# Allegro board M250V10_200210.brd
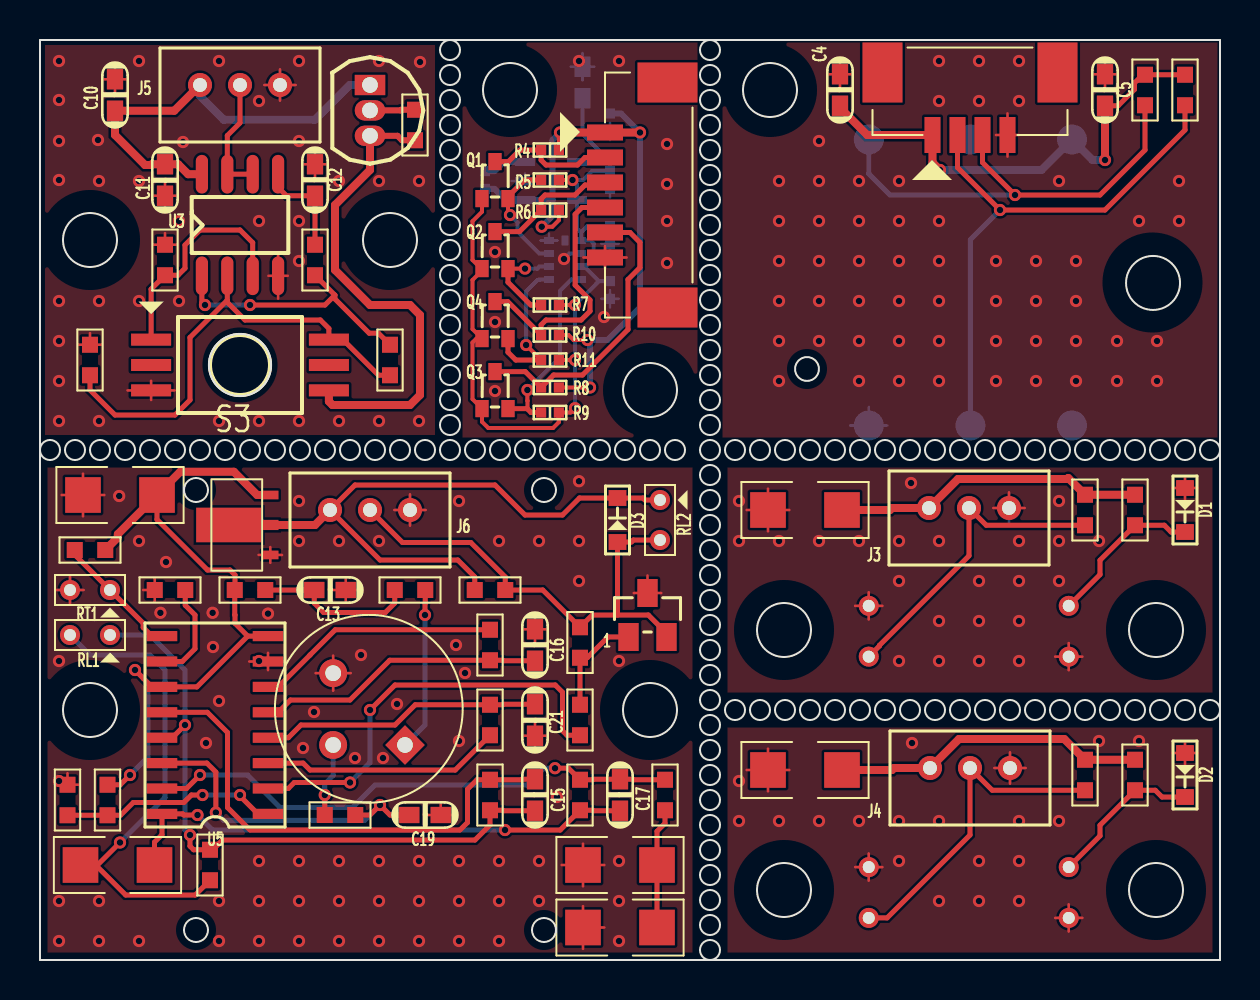
[diagram p0: board, top side]
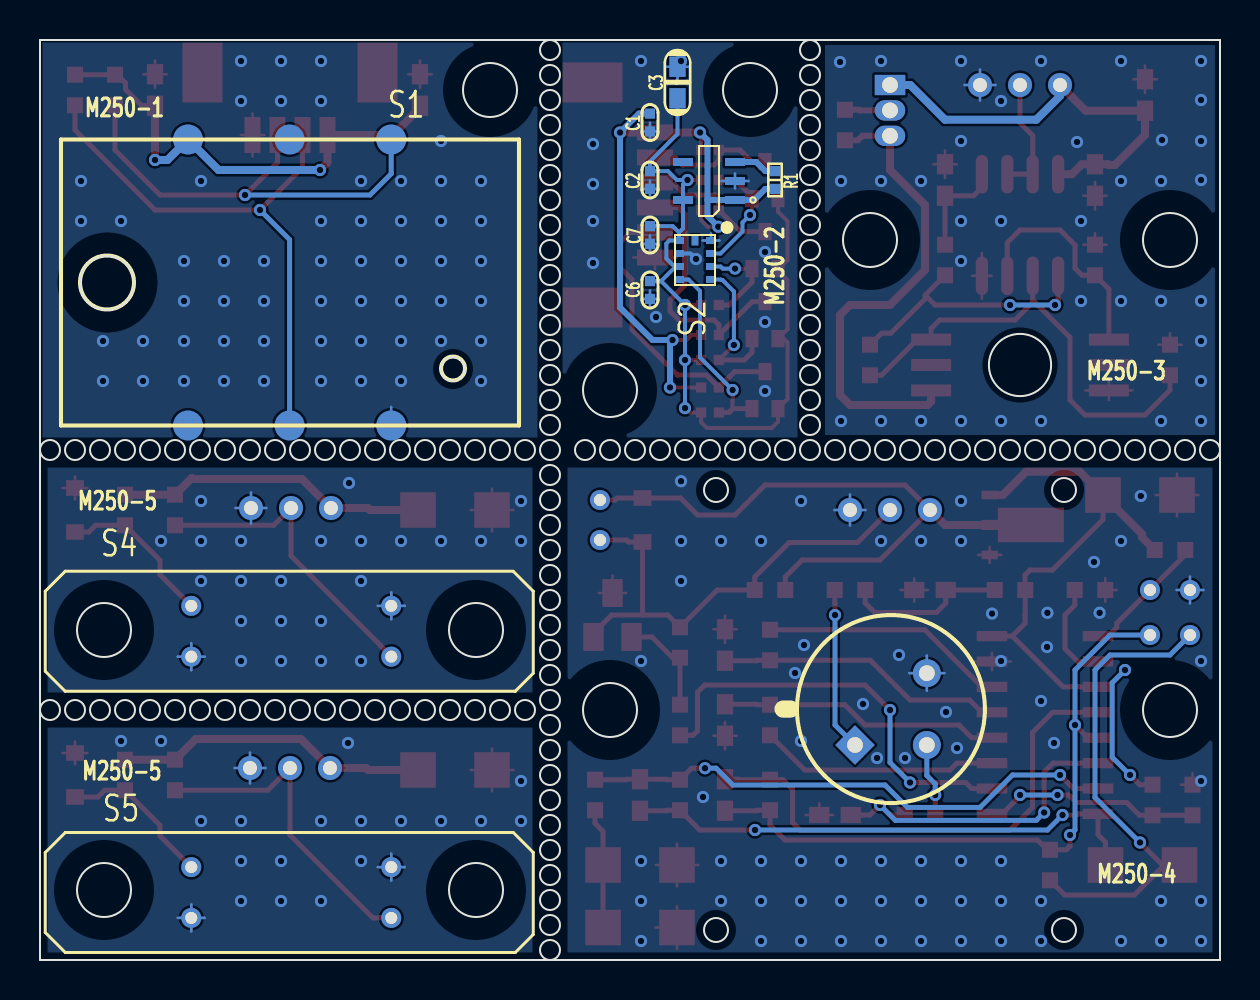
[diagram p1: board, bottom side, seen from below]

Outline 59 x 46 mm; copper layers: TOP, BOTTOM. Coordinates in mm from the lower left corner of the outline.
Outline path: circle c0.5,25.5 r0.5 ; circle c1.75,25.5 r0.5 ; circle c2.5,36 r1.35 ; circle c2.5,12.5 r1.35 ; circle c3,25.5 r0.5 ; circle c4.25,25.5 r0.5 ; circle c5.5,25.5 r0.5 ; circle c6.75,25.5 r0.5 ; circle c7.8,23.5 r0.6 ; circle c7.8,1.5 r0.6 ; circle c8,25.5 r0.5 ; circle c9.25,25.5 r0.5 ; circle c10,29.75 r1.56 ; circle c10.5,25.5 r0.5 ; circle c11.75,25.5 r0.5 ; circle c13,25.5 r0.5 ; circle c14.25,25.5 r0.5 ; circle c15.5,25.5 r0.5 ; circle c16.75,25.5 r0.5 ; circle c17.5,36 r1.35 ; circle c18,25.5 r0.5 ; circle c19.25,25.5 r0.5 ; circle c20.5,45.5 r0.5 ; circle c20.5,44.25 r0.5 ; circle c20.5,43 r0.5 ; circle c20.5,41.75 r0.5 ; circle c20.5,40.5 r0.5 ; circle c20.5,39.25 r0.5 ; circle c20.5,38 r0.5 ; circle c20.5,36.75 r0.5 ; circle c20.5,35.5 r0.5 ; circle c20.5,34.25 r0.5 ; circle c20.5,33 r0.5 ; circle c20.5,31.75 r0.5 ; circle c20.5,30.5 r0.5 ; circle c20.5,29.25 r0.5 ; circle c20.5,28 r0.5 ; circle c20.5,26.75 r0.5 ; circle c20.5,25.5 r0.5 ; circle c21.75,25.5 r0.5 ; circle c23,25.5 r0.5 ; circle c23.5,43.5 r1.35 ; circle c24.25,25.5 r0.5 ; circle c25.2,23.5 r0.6 ; circle c25.2,1.5 r0.6 ; circle c25.5,25.5 r0.5 ; circle c26.75,25.5 r0.5 ; circle c28,25.5 r0.5 ; circle c29.25,25.5 r0.5 ; circle c30.5,28.5 r1.35 ; circle c30.5,25.5 r0.5 ; circle c30.5,12.5 r1.35 ; circle c31.75,25.5 r0.5 ; circle c33.5,45.5 r0.5 ; circle c33.5,44.25 r0.5 ; circle c33.5,43 r0.5 ; circle c33.5,41.75 r0.5 ; circle c33.5,40.5 r0.5 ; circle c33.5,39.25 r0.5 ; circle c33.5,38 r0.5 ; circle c33.5,36.75 r0.5 ; circle c33.5,35.5 r0.5 ; circle c33.5,34.25 r0.5 ; circle c33.5,33 r0.5 ; circle c33.5,31.75 r0.5 ; circle c33.5,30.5 r0.5 ; circle c33.5,29.25 r0.5 ; circle c33.5,28 r0.5 ; circle c33.5,26.75 r0.5 ; circle c33.5,25.5 r0.5 ; circle c33.5,24.25 r0.5 ; circle c33.5,23 r0.5 ; circle c33.5,21.75 r0.5 ; circle c33.5,20.5 r0.5 ; circle c33.5,19.25 r0.5 ; circle c33.5,18 r0.5 ; circle c33.5,16.75 r0.5 ; circle c33.5,15.5 r0.5 ; circle c33.5,14.25 r0.5 ; circle c33.5,13 r0.5 ; circle c33.5,11.75 r0.5 ; circle c33.5,10.5 r0.5 ; circle c33.5,9.25 r0.5 ; circle c33.5,8 r0.5 ; circle c33.5,6.75 r0.5 ; circle c33.5,5.5 r0.5 ; circle c33.5,4.25 r0.5 ; circle c33.5,3 r0.5 ; circle c33.5,1.75 r0.5 ; circle c33.5,0.5 r0.5 ; circle c34.75,25.5 r0.5 ; circle c34.75,12.5 r0.5 ; circle c36,25.5 r0.5 ; circle c36,12.5 r0.5 ; circle c36.5,43.5 r1.35 ; circle c37.2,16.5 r1.35 ; circle c37.2,3.5 r1.35 ; circle c37.25,25.5 r0.5 ; circle c37.25,12.5 r0.5 ; circle c38.35,29.55 r0.6 ; circle c38.5,25.5 r0.5 ; circle c38.5,12.5 r0.5 ; circle c39.75,25.5 r0.5 ; circle c39.75,12.5 r0.5 ; circle c41,25.5 r0.5 ; circle c41,12.5 r0.5 ; circle c42.25,25.5 r0.5 ; circle c42.25,12.5 r0.5 ; circle c43.5,25.5 r0.5 ; circle c43.5,12.5 r0.5 ; circle c44.75,25.5 r0.5 ; circle c44.75,12.5 r0.5 ; circle c46,25.5 r0.5 ; circle c46,12.5 r0.5 ; circle c47.25,25.5 r0.5 ; circle c47.25,12.5 r0.5 ; circle c48.5,25.5 r0.5 ; circle c48.5,12.5 r0.5 ; circle c49.75,25.5 r0.5 ; circle c49.75,12.5 r0.5 ; circle c51,25.5 r0.5 ; circle c51,12.5 r0.5 ; circle c52.25,25.5 r0.5 ; circle c52.25,12.5 r0.5 ; circle c53.5,25.5 r0.5 ; circle c53.5,12.5 r0.5 ; circle c54.75,25.5 r0.5 ; circle c54.75,12.5 r0.5 ; circle c55.65,33.85 r1.35 ; circle c55.8,16.5 r1.35 ; circle c55.8,3.5 r1.35 ; circle c56,25.5 r0.5 ; circle c56,12.5 r0.5 ; circle c57.25,25.5 r0.5 ; circle c57.25,12.5 r0.5 ; circle c58.5,25.5 r0.5 ; circle c58.5,12.5 r0.5 ; 0,46 59,46 59,0 0,0 0,46

## Design rules (mm)
constraint set DEFAULT: min track width 0.127

## Placement (name value [footprint] x y rotation side)
C1  1uF  [C0402]  28.5 41.88 90 bottom
C2  104  [C0402]  28.5 39 90 bottom
C3  2.2uF  [C0603]  27.12 43.88 270 bottom
C4  104  [C0603]  40 43.5 270 top
C5  2.2uF  [C0603]  53.25 43.5 270 top
C6  102  [C0402]  28.5 33.5 90 bottom
C7  102  [C0402]  28.5 36.25 90 bottom
C8  106  [C1206]  38.25 22.5 0 top
C9  106  [C1206]  38.25 9.5 0 top
C10  105  [C0603]  3.75 43.25 270 top
C11  103  [C0603]  6.25 39 90 top
C12  332  [C0603]  13.75 39 270 top
C13  102  [C0603]  14.5 18.5 180 top
C14  106  [C1206]  4 23.25 0 top
C15  103  [C0603]  24.75 8.25 270 top
C16  104  [C0603]  24.75 15.75 270 top
C17  103  [C0603]  29 8.25 270 top
C18  106  [C1206]  3.88 4.75 180 top
C19  103  [C0603]  19.25 7.25 180 top
C20  106  [C1206]  29 4.75 180 top
C21  103  [C0603]  24.75 12 90 top
C22  106  [C1206]  29 1.62 180 top
D1  1N4148WS  [SOD-323]  57.25 22.5 90 top
D2  1N4148WS  [SOD-323]  57.25 9.25 90 top
D3  NI-1N4148WS  [SOD-323]  28.88 22 270 top
J1  WAFER 1.25 4P  [CCX-W125-04-SMT]  46.5 43.75 0 top
J2  WAFER 1.25 6P  [CCX-W125-06-SMT]  30.75 38.25 270 top
J3  WAFER 2.0 3P  [CP-W20-03]  46.45 22.6 180 top
J4  WAFER 2.0 3P  [CP-W20-03]  46.5 9.6 180 top
J5  WAFER 2.0 3P  [CP-W20-03]  10 43.75 180 top
J6  WAFER 2.0 3P  [CP-W20-03]  16.5 22.5 180 top
Q1  2N7002W  [SOT-323]  22.75 39 0 top
Q2  2N7002W  [SOT-323]  22.75 35.5 0 top
Q3  2N7002W  [SOT-323]  22.75 28.5 0 top
Q4  2N7002W  [SOT-323]  22.75 32 0 top
Q5  NI-2N7002  [SOT-23]  30.38 17.25 0 top
R1  100K  [R0402]  22.25 39 90 bottom
R2  10K  [R0603]  57.25 43.5 90 top
R3  10K  [R0603]  55.25 43.5 90 top
R4  10K  [R0402]  25.5 40.5 0 top
R5  10K  [R0402]  25.5 39 0 top
R6  10K  [R0402]  25.5 37.5 0 top
R7  10K  [R0402]  25.5 32.75 0 top
R8  10K  [R0402]  25.5 28.62 0 top
R9  10K  [R0402]  25.5 27.38 0 top
R10  10K  [R0402]  25.5 31.25 0 top
R11  10K  [R0402]  25.5 30 0 top
R12  1K  [R0603]  54.75 22.5 90 top
R13  5.1K  [R0603]  52.25 22.5 90 top
R14  1K  [R0603]  54.75 9.25 90 top
R15  5.1K  [R0603]  52.25 9.25 90 top
R16  680  [R0603]  18.75 41.75 90 top
R17  1M  [R0603]  13.75 35 90 top
R18  1.5M  [R0603]  6.25 35 270 top
R19  1.5M  [R0603]  2.5 30 270 top
R20  1.5M  [R0603]  17.5 30 90 top
R21  10K  [R0603]  10.5 18.5 180 top
R22  1M  [R0603]  2.5 20.5 0 top
R23  18K  [R0603]  18.5 18.5 180 top
R24  NI-10K  [R0603]  22.5 18.5 180 top
R25  1M  [R0603]  6.5 18.5 0 top
R26  1M  [R0603]  22.5 15.75 270 top
R27  1M  [R0603]  22.5 8.25 90 top
R28  10K  [R0603]  8.5 4.75 90 top
R29  0  [R0603]  27 15.88 90 top
R30  18K  [R0603]  15 7.25 0 top
R31  10K  [R0603]  22.5 12 90 top
R32  1.5K  [R0603]  27 12 90 top
R33  1M  [R0603]  27 8.25 90 top
R34  18K  [R0603]  31.25 8.25 90 top
R35  1K  [R0603]  3.38 8 90 top
R36  NI-1K  [R0603]  1.38 8 90 top
RL1  B2S  [PIN-W20-02]  2.5 16.25 180 top
RL2  NI-B2S  [PIN-W20-02]  31 22 270 top
RT1  B2S  [PIN-W20-02]  2.5 18.5 180 top
S1  MICS-VZ-89T  [MICS-VZ]  46.5 33.88 180 bottom
S2  2SMPB-02E  [LGA-9]  26.25 35 270 bottom
S3  2SMPP-02  [2SMPP]  10 29.75 90 top
S4  -  [ST151]  46.44 16.44 180 bottom
S5  -  [ST151]  46.44 3.38 180 bottom
S6  -  [TO-39]  18.25 10.75 135 bottom
U1  RT9013-18PB  [SOT23-5]  24.25 38 90 bottom
U2  LM334  [TO-92]  16.5 43.75 270 top
U3  TLC2272  [SOIC-8]  10 36.75 0 top
U4  HT7133  [SOT-89]  9.88 21.75 180 top
U5  BISS0001  [SOIC-16]  8.75 11.75 180 top

## Library data of the parts
C1 C3 C5 C8 C9 C14 C15 C17 C18 C20 C22 = CAPACITOR_0: room: PMU
C2 C4 C6 C7 C10-C13 C16 C19 C21 = CAPACITOR
D1-D3 = DIODE_SCHTKY_0
J1 = CONN RCPT 4
J2 = CONN RCPT 6
J3-J6 = CONN RECT 3
Q1-Q5 = MOS-N_8
R1 = RESISTOR
R2-R36 = R
RL1 RL2 RT1 = B2S_0
S1 = XC9216_3
S2 = XC9216_6
S3 = XC9216_7
S4 S5 = TLP632_1
S6 = MC78PC18NTR_3_TO-39_IRA-S210ST0
U1 = MC78PC18NTR_2
U2 = MC78PC18NTR_0
U3 = TLC2272/SO
U4 = AMS1117-AOI_3
U5 = NE555_2

## Footprints (pads in the part's own frame, mm; a bottom-side part is the same pattern mirrored in y, then rotated)
2SMPP
  rect 0.6x2 smd: 1(1.27,4.445) 2(0,4.445) 3(-1.27,4.445) 4(-1.27,-4.445) 5(0,-4.445) 6(1.27,-4.445)
C0402
  rect 0.508x0.508 smd: 1(-0.445,0) 2(0.445,0)
C0603
  rect 1.016x0.813 smd: 1(-0.787,0) 2(0.787,0)
C1206
  rect 1.78x1.78 smd: 1(-1.85,0) 2(1.85,0)
CCX-W125-04-SMT
  rect 2x3 smd: (-4.375,0.625) (4.375,0.625)
  rect 0.8x1.8 smd: 1(-1.875,-2.5) 2(-0.625,-2.5) 3(0.625,-2.5) 4(1.875,-2.5)
CCX-W125-06-SMT
  rect 2x3 smd: (-5.625,0.625) (5.625,0.625)
  rect 0.8x1.8 smd: 1(-3.125,-2.5) 2(-1.875,-2.5) 3(-0.625,-2.5) 4(0.625,-2.5) 5(1.875,-2.5) 6(3.125,-2.5)
CP-W20-03
  round 1.2 hole 0.7: 1(2,0) 2(0,0) 3(-2,0)
LGA-9
  rect 0.35x0.5 smd: 1(-0.975,0.8) 2(-0.325,0.8) 3(0.325,0.8) 4(0.975,0.8) 5(0.975,-0.8) 6(0.325,-0.8) 7(-0.325,-0.8) 8(-0.975,-0.8)
  rect 0.5x0.35 smd: 9(-0.975,0)
MICS-VZ
  round 1.5 smd: 1(-5.1,-7.15) 2(-0.02,-7.15) 3(5.06,-7.15) 4(5.06,7.15) 5(-0.02,7.15) 6(-5.1,7.15)
PIN-W20-02
  round 1 hole 0.6: 1(-1,0) 2(1,0)
R0402
  rect 0.508x0.508 smd: 1(-0.445,0) 2(0.445,0)
R0603
  rect 0.8x0.8 smd: 1(-0.762,0) 2(0.762,0)
SOD-323
  rect 0.787x0.889 smd: 1(1.1,0) 2(-1.1,0)
SOIC-8
  oval 0.61x1.93 smd: 1(-1.905,-2.54) 2(-0.635,-2.54) 3(0.635,-2.54) 4(1.905,-2.54) 5(1.905,2.54) 6(0.635,2.54) 7(-0.635,2.54) 8(-1.905,2.54)
SOIC-16
  rect 1.524x0.508 smd: 1(-2.65,4.445) 2(-2.65,3.175) 3(-2.65,1.905) 4(-2.65,0.635) 5(-2.65,-0.635) 6(-2.65,-1.905) 7(-2.65,-3.175) 8(-2.65,-4.445) 9(2.65,-4.445) 10(2.65,-3.175) 11(2.65,-1.905) 12(2.65,-0.635) 13(2.65,0.635) 14(2.65,1.905) 15(2.65,3.175) 16(2.65,4.445)
SOT23-5
  rect 0.4x1 smd: 1(0,0) 2(0.95,0) 3(1.9,0) 4(1.9,2.6) 5(0,2.6)
SOT-23
  rect 1.016x1.397 smd: 1(-0.95,-1.1) 2(0.95,-1.1) 3(0,1.1)
SOT-89
  rect 0.813x0.432 smd: 1(-1.64,1.497) 3(-1.64,-1.5)
  custom 4.115x1.727 smd: 2(0.011,-0.001)
SOT-323
  rect 0.66x0.86 smd: 1(-0.65,-0.93) 2(0.65,-0.93) 3(0,0.92)
ST151
  round 1 hole 0.6: 1(-5,-1.27) 2(-5,1.27) 3(5,1.27) 4(5,-1.27)
TO-39
  rect 1.397x1.397 hole 0.787: 1(0,0)
  round 1.397 hole 0.787: 2(2.54,-2.54) 3(5.08,0)
TO-92
  rect 1.016x1.524 hole 0.787: 1(0,0)
  oval 1.016x1.524 hole 0.787: 2(1.27,0) 3(2.54,0)

## Nets
3V3: C4.2 C5.2 J1.1 R2.2 R3.2 S1.6(VIN)
5V0: C10.2 C11.2 J5.1 U2.1 U3.8
GND: C1.1 C2.1 C3.1 C4.1 C5.1 C6.1 C7.1 C8.1 C9.1 C10.1 C11.1 C12.1 C13.1 C14.1 C16.1 C19.1 C20.2 C21.1 C22.2 D1.1 D2.1 J1.4 J2.6 J3.3 J4.3 J5.3 J6.3 Q5.3 R18.1 R19.1 R25.1 R36.2 RT1.2 S1.3 S2.1 S2.7 S3.3 S4.1 S4.3(EMITTER) S5.1 S5.3(EMITTER) S6.3 U1.2 U3.4 U4.1 U5.7(VSS)
V1.8: C2.2 C3.2 C6.2 C7.2 Q1.1 Q2.1 Q3.1 Q4.1 R5.2 R7.2 R9.2 R11.2 S2.6 S2.8 U1.5(VOUT)
V3.3: C1.2 J2.1 R1.1 R4.2 R6.2 R8.2 R10.2 U1.1
V5.0: C8.2 C9.2 J3.1 J4.1 R12.2 R13.2 R14.2 R15.2
I2C0-SCK: J1.2 R2.1 S1.2
I2C0-SDA: J1.3 R3.1 S1.4
OSW: J3.2 J4.2 R13.1 R15.1 S4.4 S5.4
PIR: D3.1 J6.2 Q5.2(SOURCE) R24.1 R29.2 RL2.2
PRS: J5.2 U3.6 U3.7(OUT)
PRS_CLK: Q2.2(SOURCE) R7.1 S2.3
PRS_CSB: Q1.2(SOURCE) R5.1 S2.2
PRS_MISO: Q3.2(SOURCE) R9.1 S2.5
PRS_MOSI: Q4.2(SOURCE) R11.1 S2.4
SPI-CLK: J2.3 Q2.3 R6.1
SPI-CS: J2.2 Q1.3 R4.1
SPI-MISO: J2.5 Q3.3 R8.1
SPI-MOSI: J2.4 Q4.3 R10.1
VC3: C14.2 R21.2 R22.2 R35.2 U4.3(VOUT) U5.8 U5.11
VC5: D3.2(C) J6.1 R24.2 RL2.1 U4.2
N16739615: R1.2 U1.3
N16752520: R16.2 U2.2
N16752527: R16.1 S3.4 U2.3(V-)
N16752698: R19.2 R20.1 S3.6(VO-) U3.2
N16753772: R18.2 S3.1 U3.3
N16753820: R17.1 R20.2 U3.1
N16754889: C12.2 R17.2 U3.5
N16759389: D1.2(C) R12.1 S4.2
N16759996: R23.1 S6.1
N16766845: C15.2 R27.1 R28.2 RL1.1 U5.13
N16766853: C15.1 R27.2 U5.12
N16767234: C18.2 R28.1 RL1.2
N16767303: C17.2 C18.1 R33.1 U5.16
N16767311: C17.1 R33.2 R34.2 U5.15
N16767751: C20.1 C22.1 R34.1
N16768643: R30.1 S6.2(S)
N16768647: C19.2 R30.2 U5.14
N16769008: R22.1 RT1.1 U5.9
N16770080: C13.2 R21.1 R23.2
N16770609: R35.1 R36.1 U5.1
N16770930: R32.1 U5.2
N16771107: Q5.1 R29.1 R32.2
N16772170: R31.1 U5.3
N16772238: C21.2 R31.2 U5.4
N16772569: C16.2 R26.2 U5.5
N16772626: R26.1 U5.6
N16777000: R25.2 U5.10
N16790844: D2.2(C) R14.1 S5.2

Pads without a net: S1 1 5; S2 9; S3 2 5; U1 4

## Via types
v1: diameter 0.61, hole 0.33, TOP to BOTTOM, 245 vias

## Routing (per net, layer and track width the routed paths; a pad name or vN(x,y) marks a point on that pad's centre or on a via; arc(x,y) is an arc through that point)
3V3: length 24
  TOP w0.25: C5.2 53.91,42.71 54.73,43.53 54.73,43.85 55.14,44.26 R3.2 R2.2
  TOP w0.4: v1(45,39.5) 44.62,39.88 J1.1 41.36,41.25 40,42.61 C4.2 ; C5.2 v1(53.25,40)
  BOTTOM w0.4: v1(53.25,40) 52.62,40 S1.6 50.08,39.5 v1(45,39.5)
5V0: length 21.4
  TOP w0.4: J5.1 6.71,42.46 C10.2 3.75,41.25 5.25,39.75 5.55,39.75 5.59,39.79 C11.2 6.91,39.79 7.41,39.29 U3.8
  BOTTOM w0.4: U2.1 15.49,43.75 13.75,42.01 9.18,42.01 8,43.2 J5.1
GND: length 149.2
  TOP w0.127: C22.2 28.22,1.62 ; C22.2 27.15,0.56 ; C22.2 27.15,2.69 ; RT1.2 1.5,19.18 ; RT1.2 0.82,18.5 ; RT1.2 1.5,17.82 ; RT1.2 2.18,18.5 ; 11.4,14.49 U5.7 ; U5.7 12.34,14.93 ; U5.7 10.46,14.93 ; U5.7 11.4,15.36 ; J4.3 49.28,9.6 ; J4.3 48.5,8.82 ; J4.3 47.72,9.6 ; J4.3 48.5,10.38 ; 6.25,37.53 C11.1 ; C11.1 6.25,38.9 ; C11.1 5.67,38.21 ; C11.1 6.83,38.21 ; J2.6 29.33,35.12 ; J2.6 27.17,35.12 ; J2.6 28.25,35.7 ; J2.6 28.25,34.55 ; S4.3 41.44,18.39 ; S4.3 42.12,17.71 ; S4.3 40.76,17.71 ; S4.3 41.44,17.03 ; R19.1 3.08,30.76 ; R19.1 2.5,31.34 ; R19.1 1.92,30.76 ; C5.1 53.25,44.97 ; C5.1 53.25,43.6 ; C5.1 53.83,44.29 ; C5.1 52.67,44.29 ; C12.1 13.75,40.47 ; C12.1 14.33,39.79 ; C12.1 13.17,39.79 ; C12.1 13.75,39.1 ; C13.1 15.29,19.08 ; C13.1 15.29,17.92 ; C13.1 15.97,18.5 ; C13.1 14.6,18.5 ; 39.42,44.29 C4.1 ; C4.1 40,44.97 ; C4.1 40,43.6 ; C4.1 40.58,44.29 ; 10.93,20.25 U4.1 ; U4.1 12.1,20.25 ; U4.1 11.52,20.65 ; U4.1 11.52,19.86 ; S5.1 52.12,2.11 ; S5.1 50.76,2.11 ; S5.1 51.44,2.78 ; S5.1 51.44,1.43 ; 18.5,21.72 J6.3 ; J6.3 18.5,23.28 ; J6.3 17.72,22.5 ; J6.3 19.28,22.5 ; Q5.3 31.06,18.35 ; Q5.3 29.69,18.35 ; Q5.3 30.38,19.23 ; 3.17,44.04 C10.1 ; C10.1 3.75,44.72 ; C10.1 3.75,43.35 ; C10.1 4.33,44.04 ; 40.76,4.64 S5.3 ; S5.3 41.44,5.32 ; S5.3 42.12,4.64 ; S5.3 41.44,3.97 ; C9.1 36.4,10.57 ; C9.1 35.33,9.5 ; C9.1 37.47,9.5 ; C9.1 36.4,8.43 ; J1.4 48.95,41.25 ; J1.4 48.38,42.33 ; J1.4 47.8,41.25 ; J1.4 48.38,40.17 ; 35.33,22.5 C8.1 ; C8.1 36.4,21.43 ; C8.1 36.4,23.57 ; C8.1 37.47,22.5 ; R36.2 1.38,9.34 ; R36.2 0.8,8.76 ; R36.2 1.95,8.76 ; C20.2 28.22,4.75 ; C20.2 27.15,3.68 ; C20.2 26.08,4.75 ; C20.2 27.15,5.82 ; 5.67,35.76 R18.1 ; R18.1 6.83,35.76 ; R18.1 6.25,36.34 ; 24.17,11.21 C21.1 ; C21.1 24.75,10.53 ; C21.1 24.75,11.9 ; C21.1 25.33,11.21 ; R25.1 5.74,19.08 ; R25.1 5.16,18.5 ; R25.1 5.74,17.92 ; J5.3 12.78,43.75 ; J5.3 11.22,43.75 ; J5.3 12,44.53 ; J5.3 12,42.97 ; S4.1 51.44,15.85 ; S4.1 51.44,14.49 ; S4.1 52.12,15.17 ; S4.1 50.76,15.17 ; C16.1 24.75,17.22 ; C16.1 24.17,16.54 ; C16.1 25.33,16.54 ; C16.1 24.75,15.85 ; 57.25,9.78 D2.1 ; D2.1 57.25,10.92 ; D2.1 56.63,10.35 ; D2.1 57.87,10.35 ; J3.3 48.45,23.38 ; J3.3 49.23,22.6 ; J3.3 47.67,22.6 ; C19.1 20.72,7.25 ; C19.1 19.35,7.25 ; C19.1 20.04,7.83 ; U3.4 12.39,34.21 ; U3.4 11.91,35.35 ; U3.4 11.91,33.07 ; U3.4 11.42,34.21 ; D1.1 57.25,24.17 ; D1.1 57.25,23.03 ; D1.1 57.87,23.6 ; D1.1 56.63,23.6 ; 13.78,14.34 S6.3 ; S6.3 14.66,13.47 ; S6.3 15.53,14.34 ; S6.3 14.66,15.22 ; C14.1 2.15,24.32 ; C14.1 2.15,22.18 ; C14.1 3.22,23.25 ; C14.1 1.08,23.25 ; 5.55,28 S3.3 ; S3.3 6.73,28.48 ; S3.3 5.55,28.96 ; S3.3 4.38,28.48
  BOTTOM w0.127: 28.07,35.81 C7.1 ; C7.1 28.5,36.24 ; C7.1 28.93,35.81 ; C7.1 28.5,35.37 ; 51.44,1.43 S5.1 ; S5.1 51.44,2.78 ; S5.1 52.12,2.11 ; S5.1 50.76,2.11 ; RT1.2 2.18,18.5 ; RT1.2 1.5,17.82 ; RT1.2 1.5,19.18 ; RT1.2 0.82,18.5 ; 47.72,9.6 J4.3 ; J4.3 48.5,8.82 ; J4.3 48.5,10.38 ; J4.3 49.28,9.6 ; S5.3 42.12,4.64 ; S5.3 41.44,5.32 ; S5.3 40.76,4.64 ; S5.3 41.44,3.97 ; 24.25,38.57 U1.2 ; U1.2 24.25,39.33 ; U1.2 24.93,38.95 ; U1.2 23.57,38.95 ; C6.1 28.5,33.49 ; C6.1 28.93,33.06 ; C6.1 28.5,32.62 ; C6.1 28.07,33.06 ; 28.5,38.12 C2.1 ; C2.1 28.5,38.99 ; C2.1 28.93,38.56 ; C2.1 28.07,38.56 ; S4.3 41.44,18.39 ; S4.3 41.44,17.03 ; S4.3 42.12,17.71 ; S4.3 40.76,17.71 ; 27.12,43.98 C3.1 ; C3.1 26.54,44.66 ; C3.1 27.71,44.66 ; C3.1 27.12,45.35 ; S4.1 51.44,15.85 ; S4.1 50.76,15.17 ; S4.1 52.12,15.17 ; S4.1 51.44,14.49 ; S1.3 42.37,26.73 ; S1.3 40.51,26.73 ; S1.3 41.44,27.65 ; 28.07,41.43 C1.1 ; C1.1 28.93,41.43 ; C1.1 28.5,41 ; C1.1 28.5,41.86 ; J3.3 48.45,23.38 ; J3.3 49.23,22.6 ; J3.3 47.67,22.6 ; J3.3 48.45,21.82 ; 13.78,14.34 S6.3 ; S6.3 14.66,15.22 ; S6.3 14.66,13.47 ; S6.3 15.53,14.34 ; 12,42.97 J5.3 ; J5.3 12,44.53 ; J5.3 12.78,43.75 ; J5.3 11.22,43.75 ; J6.3 19.28,22.5 ; J6.3 18.5,21.72 ; J6.3 17.72,22.5 ; J6.3 18.5,23.28 ; 25.02,35.98 S2.1 ; S2.1 25.88,35.98 ; S2.1 25.45,36.33
  BOTTOM w0.2: v1(26.2,35.05) 26.48,35.33 S2.7
  vias: v1(0.95,44.95) v1(0.95,43) v1(0.95,40.95) v1(0.95,39) v1(0.95,32.95) v1(0.95,30.95) v1(0.95,28.95) v1(0.95,26.95) v1(0.95,14.95) v1(0.95,8.95) v1(0.95,2.95) v1(0.95,0.95) v1(2.9,41) v1(2.95,38.95) v1(2.95,32.95) v1(2.95,26.95) v1(2.95,2.95) v1(2.95,0.95) v1(3.96,23.2) v1(4.95,44.95) v1(4.95,38.95) v1(4.95,32.95) v1(4.95,20.95) v1(4.95,0.95) v1(6.02,17.36) v1(6.3,19.9) v1(6.95,36.95) v1(6.95,32.95) v1(7.15,40.9) v1(8.3,10.85) v1(8.63,17.36) v1(8.65,15.65) v1(8.95,44.95) v1(8.95,26.95) v1(8.95,12.95) v1(8.95,2.95) v1(8.95,0.95) v1(10.95,42.95) v1(10.95,36.95) v1(10.95,26.95) v1(10.95,14.95) v1(10.95,4.95) v1(10.95,2.95) v1(10.95,0.95) v1(11.4,17.32) v1(12.95,44.95) v1(12.95,40.95) v1(12.95,36.95) v1(12.95,34.95) v1(12.95,26.95) v1(12.95,22.95) v1(12.95,20.95) v1(12.95,4.95) v1(12.95,2.95) v1(12.95,0.95) v1(13.15,10.6) v1(13.7,12.4) v1(14.95,38.95) v1(14.95,26.95) v1(14.95,20.95) v1(14.95,4.95) v1(14.95,2.95) v1(14.95,0.95) v1(15.75,10.1) v1(16.05,15.25) v1(16.95,44.95) v1(16.95,38.95) v1(16.95,26.95) v1(16.95,20.95) v1(16.95,4.95) v1(16.95,2.95) v1(16.95,0.95) v1(17.15,10.1) v1(17.85,12.8) v1(19,44.9) v1(18.95,38.95) v1(18.95,26.95) v1(18.95,4.95) v1(18.95,2.95) v1(18.95,0.95) v1(20.8,15.75) v1(20.95,22.95) v1(20.95,10.95) v1(20.95,4.95) v1(20.95,2.95) v1(20.95,0.95) v1(21.25,14.35) v1(22.75,35.4) v1(22.75,31.9) v1(22.75,28.45) v1(22.95,20.95) v1(22.95,4.95) v1(22.95,2.95) v1(22.95,0.95) v1(24.95,20.95) v1(24.95,4.95) v1(24.95,2.95) v1(25.85,8.15) v1(26.95,44.95) v1(26.95,23.94) v1(26.95,20.95) v1(26.95,18.95) v1(28.2,32.15) v1(28.95,44.95) v1(28.95,14.95) v1(28.95,4.95) v1(28.95,2.95) v1(28.95,0.95) v1(31.35,40.8) v1(31.35,38.8) v1(31.35,36.95) v1(31.35,34.85) v1(34.95,22.95) v1(34.95,20.95) v1(34.95,8.95) v1(34.95,6.95) v1(36.95,38.95) v1(36.95,36.95) v1(36.95,34.95) v1(36.95,32.95) v1(36.95,30.95) v1(36.95,28.95) v1(36.95,20.95) v1(36.95,6.95) v1(38.95,40.95) v1(38.95,38.95) v1(38.95,36.95) v1(38.95,34.95) v1(38.95,32.95) v1(38.95,30.95) v1(38.95,20.95) v1(38.95,6.95) v1(40.95,38.95) v1(40.95,36.95) v1(40.95,34.95) v1(40.95,32.95) v1(40.95,30.95) v1(40.95,28.95) v1(40.95,20.95) v1(40.95,6.95) v1(42.95,38.95) v1(42.95,36.95) v1(42.95,34.95) v1(42.95,32.95) v1(42.95,30.95) v1(42.95,28.95) v1(42.95,20.95) v1(42.95,18.95) v1(42.95,14.95) v1(42.95,6.95) v1(42.95,4.95) v1(43.55,23.85) v1(43.6,10.85) v1(44.95,44.95) v1(44.95,42.95) v1(44.95,36.95) v1(44.95,34.95) v1(44.95,32.95) v1(44.95,30.95) v1(44.95,28.95) v1(44.95,20.95) v1(44.95,16.95) v1(44.95,14.95) v1(44.95,6.95) v1(44.95,2.95) v1(46.95,44.95) v1(46.95,42.95) v1(46.95,18.95) v1(46.95,16.95) v1(46.95,14.95) v1(46.95,4.95) v1(46.95,2.95) v1(47.8,34.95) v1(47.8,32.95) v1(47.8,30.95) v1(47.8,28.95) v1(48.95,44.95) v1(48.95,42.95) v1(48.95,20.95) v1(48.95,18.95) v1(48.95,16.95) v1(48.95,14.95) v1(48.95,6.95) v1(48.95,4.95) v1(48.95,2.95) v1(49.8,34.95) v1(49.8,32.95) v1(49.8,30.95) v1(49.8,28.95) v1(50.95,38.95) v1(50.95,22.95) v1(50.95,20.95) v1(50.95,18.95) v1(50.95,6.95) v1(51.8,34.95) v1(51.8,32.95) v1(51.8,30.95) v1(51.8,28.95) v1(52.95,20.95) v1(52.95,10.95) v1(53.85,30.95) v1(53.85,28.95) v1(54.95,36.95) v1(54.95,10.95) v1(55.85,30.95) v1(55.85,28.95) v1(56.95,38.95) v1(56.95,36.95)
V1.8: length 42
  TOP w0.2: R7.2 v1(26.75,32.75) ; v1(26.62,39) R5.2 ; Q1.1 22.1,37.41 21.62,36.94 21.62,35 22.05,34.57 Q2.1 22.1,34.48 21.62,34 21.62,31.55 Q4.1 21.82,31.07 21.62,30.88 21.62,28.05 Q3.1 22.1,26.91 22.41,26.6 25.65,26.6 25.94,26.89 R9.2 26.53,27.38 v1(26.75,27.59) ; R11.2 v1(26.75,30)
  BOTTOM w0.2: 27.94,33.94 27.28,34.61 27.28,34.67 ; 27.94,33.94 C6.2 ; 27.94,33.94 v1(26.75,32.75) v1(26.75,30) v1(26.75,27.59) ; C3.2 27.12,41.3 28.5,39.93 C2.2 27.6,39.44 27.16,39 v1(26.62,39) 26.85,38.77 U1.5 26.85,36.58 27.05,36.38 ; C7.2 27.37,36.69 27.05,36.38 ; 27.05,36.38 S2.8 27.53,35.98 27.68,35.82 27.68,35.08 27.28,34.67 ; 27.28,34.67 S2.6
V3.3: length 34.6
  TOP w0.2: v1(25.09,36.66) 25.62,36.66 25.94,36.99 R6.2 ; v1(26,41.38) 25.94,41.32 R4.2 ; R10.2 26.43,31.25 26.68,31 v1(27.38,31) ; R8.2 v1(27.5,28.62)
  TOP w0.4: v1(30,41.38) J2.1 v1(26,41.38)
  BOTTOM w0.3: 25.62,38.01 25.62,37.2 v1(25.09,36.66) ; 25.62,38.01 25.62,40.75 25.62,40.75 25.62,41 v1(26,41.38) ; 25.62,38.01 25.62,38 U1.1 23.29,38 22.73,38.56 R1.1 ; v1(27.5,28.62) 27.5,30.88 v1(27.38,31) 28.38,31 30,32.62 v1(30,41.38) 29.06,42.32 C1.2
V5.0: length 31.4
  TOP w0.4: R12.2 R13.2 51.41,24.1 51.36,24.05 45.9,24.05 J3.1 42.6,22.6 42.5,22.5 C8.2 ; C9.2 42.6,9.5 42.7,9.6 J4.1 45.95,11.05 51.21,11.05 R15.2 R14.2
I2C0-SCK: length 28.2
  TOP w0.25: J1.2 45.88,39.62 v1(48,37.5) 53.25,37.5 57.25,41.5 R2.1
  BOTTOM w0.25: S1.2 46.52,36.02 v1(48,37.5)
I2C0-SDA: length 22.8
  TOP w0.25: R3.1 55.25,40.5 53,38.25 v1(48.75,38.25) 47.12,39.88 J1.3
  BOTTOM w0.25: v1(48.75,38.25) 42.5,38.25 41.44,39.31 S1.4
OSW: length 32
  TOP w0.25: S5.4 42.36,2.11 46.5,6.25 J4.2 47.61,8.49 R15.1 ; R13.1 47.31,21.74 J3.2 46.45,20.21 41.97,15.73 41.97,15.7 S4.4
PIR: length 24.3
  TOP w0.25: J6.2 18.12,20.88 21.54,20.88 23.26,19.15 R24.1 25.14,18.5 R29.2 27.61,17.25 28.88,17.25 ; Q5.2 31.32,16.34 30.42,17.25 28.88,17.25 ; 28.88,17.25 D3.1 29.57,20.9 29.67,21 RL2.2
PRS: length 6
  TOP w0.25: U3.6 U3.7 9.37,41.22 10,41.86 J5.2
PRS_CLK: length 4.9
  TOP w0.2: Q2.2 v1(24.25,34.57)
  TOP w0.25: Q2.2 23.4,33.89 24.54,32.75 R7.1
  BOTTOM w0.2: v1(24.25,34.57) 24.87,34.57 24.97,34.67 S2.3
PRS_CSB: length 6
  TOP w0.2: v1(23.5,37.25) 23.4,37.35 Q1.2
  TOP w0.25: R5.1 24.23,39 23.4,38.17 Q1.2
  BOTTOM w0.2: v1(23.5,37.25) 23.88,36.87 23.88,36.42 24.97,35.33 S2.2
PRS_MISO: length 9.9
  TOP w0.2: 24.57,27.38 24.38,27.57 24.38,27.96 24.37,27.97 v1(24.37,28.5)
  TOP w0.25: R9.1 24.55,27.38 24.35,27.57 Q3.2
  BOTTOM w0.2: v1(24.37,28.5) 26,30.13 26,33.45 26.57,34.02 S2.5
PRS_MOSI: length 7.6
  TOP w0.2: R11.1 v1(24.31,30.75)
  TOP w0.25: R11.1 23.79,30 23.4,30.39 Q4.2
  BOTTOM w0.2: S2.4 24.97,34.02 24.95,34 24.88,34 24.31,33.43 v1(24.31,30.75)
SPI-CLK: length 6.8
  TOP w0.25: J2.3 28.12,38.75 27.25,38.75 26.75,38.25 25.25,38.25 25.06,38.06 R6.1 23.98,36.42 Q2.3
SPI-CS: length 6.5
  TOP w0.25: J2.2 27.25,40.12 26.88,39.75 25.3,39.75 25.06,39.99 R4.1 24,40.5 23.42,39.92 Q1.3
SPI-MISO: length 14.7
  TOP w0.25: Q3.3 24.26,29.42 R8.1 25.68,29.25 27.12,29.25 29.4,31.52 29.4,34.02 30,34.62 30,35.88 29.5,36.38 J2.5
SPI-MOSI: length 13
  TOP w0.25: Q4.3 23.39,32.92 R10.1 25.06,31.76 25.3,32 27.06,32 27.5,32.44 27.5,33 26.76,33.74 26.76,37.28 27.1,37.62 J2.4
VC3: length 35.3
  TOP w0.25: 10.39,16.2 U5.8 ; 10.39,16.2 7.85,13.65 U5.11 5.59,13.65 5.16,14.09 5.16,14.09 v1(4.75,14.5) ; 10.39,16.2 9.75,16.83 9.75,17.25 9.74,17.26 R21.2 9.75,18.51 9.75,19.25 9.5,19.5 8.38,19.5 5.85,22.02 C14.2 ; v1(4.5,9.25) 4.01,8.76 R35.2
  TOP w0.4: R22.2 3.89,21.13 3.89,21.29 C14.2 7.01,24.41 9.69,24.41 10.86,23.25 U4.3
  BOTTOM w0.25: v1(4.75,14.5) 5.39,13.86 5.39,10.14 v1(4.5,9.25)
VC5: length 32.3
  TOP w0.25: R24.2 21.74,19.15 20.89,20 17,20 J6.1 15.75,23.75 22.75,23.75 24.25,22.25 26.12,22.25 26.98,23.1 D3.2 30.15,23.1 30.25,23 RL2.1
  TOP w0.4: J6.1 13.75,21.75 U4.2
N16739615: length 2.2
  BOTTOM w0.3: R1.2 22.73,39.44 23.19,39.9 U1.3
N16752520: length 2.3
  TOP w0.3: U2.2 18.02,42.48 18.06,42.51 R16.2
N16752527: length 24.3
  TOP w0.3: U2.3 17.88,41.21 18.1,40.99 R16.1
  TOP w0.4: 14.45,28.48 14.45,27.93 14.62,27.75 18.5,27.75 19,28.25 19,32.25 18.5,32.75 16.5,32.75 14.75,34.5 14.75,37.75 16.5,39.5 U2.3
N16752698: length 23.6
  TOP w0.25: R19.2 2.5,28.5 3.75,27.25 6.75,27.25 7.5,28 7.5,31.13 9.37,32.99 ; 9.37,32.99 U3.2 ; 9.37,32.99 9.37,32.89 10.25,32 14.02,32 14.45,31.57 14.45,31.02 15.14,31.02 16.93,29.24 R20.1
N16753772: length 11.4
  TOP w0.25: U3.3 10.63,35.86 10,36.5 8,36.5 7.25,35.75 7.25,34.59 6.9,34.24 R18.2 5.55,33.54 S3.1
N16753820: length 13.5
  TOP w0.25: 14.74,33.24 14.25,32.75 v1(10.5,32.75) ; 14.74,33.24 R17.1 ; 14.74,33.24 14.74,33.06 16.46,31.34 16.92,31.34 R20.2 ; U3.1 8.1,32.91 v1(8.25,32.75)
  BOTTOM w0.25: v1(8.25,32.75) v1(10.5,32.75)
N16754889: length 5.1
  TOP w0.25: U3.5 11.91,38.63 12.32,38.21 C12.2 R17.2
N16759389: length 8
  TOP w0.25: D1.2 56.55,21.4 56.22,21.74 R12.1 53,19.99 53,19.27 S4.2
N16759996: length 8.2
  TOP w0.25: R23.1 19.26,17.85 19.25,17.84 v1(19.25,17.25)
  BOTTOM w0.25: S6.1 19.25,11.75 v1(19.25,17.25)
N16766845: length 33.4
  TOP w0.25: C15.2 23.18,7.46 23.15,7.49 R27.1 22.5,6.75 21.75,6 9.12,6 8.64,5.51 R28.2 7.68,5.51 7.5,5.69 v1(7.5,6.25) ; U5.13 6.62,11.12 v1(7.25,11.75)
  BOTTOM w0.25: RL1.1 5.5,16.25 7.25,14.5 v1(7.25,11.75) 7.25,6.5 v1(7.5,6.25)
N16766853: length 25.3
  TOP w0.25: C15.1 24.09,9.04 24.07,9.01 R27.2 21.85,9.01 21.38,8.54 21.38,6.88 21,6.5 10.5,6.5 9.38,7.62 9.38,11.38 8.37,12.38 6.1,12.38
N16767234: length 24.1
  TOP w0.25: 2.88,4.75 v1(4,5.88) ; 2.88,4.75 2.88,4.66 4.28,3.25 7.76,3.25 R28.1 ; 2.88,4.75 C18.2
  BOTTOM w0.25: v1(4,5.88) 6.25,8.12 6.25,14.5 5.5,15.25 2.5,15.25 RL1.2
N16767303: length 26.4
  TOP w0.25: C18.1 5.72,5.89 6.1,6.27 U5.16 7.14,7.3 7.19,7.25 v1(7.88,7.25) ; v1(23.25,6.5) 26.01,6.5 R33.1 27.65,7.49 27.68,7.46 C17.2
  BOTTOM w0.25: v1(23.25,6.5) 8.62,6.5 v1(7.88,7.25)
N16767311: length 27.2
  TOP w0.25: R34.2 29.68,9.01 29.66,9.04 C17.1 27.68,9.04 27.65,9.01 R33.2 26.42,9.59 v1(25.75,9.59) ; v1(8,9.25) 7.32,8.57 U5.15
  BOTTOM w0.25: v1(25.75,9.59) 25.19,9.59 24.35,8.75 16.75,8.75 15.63,7.63 12,7.63 10.38,9.25 v1(8,9.25)
N16767751: length 6
  TOP w0.25: R34.1 31.25,6.84 30.85,6.44 C20.1 C22.1
N16768643: length 3.7
  TOP w0.25: R30.1 v1(14.24,8.25)
  BOTTOM w0.25: v1(14.24,8.25) 14.24,8.81 14.66,9.23 S6.2
N16768647: length 16.7
  TOP w0.25: C19.2 17.5,7.25 v1(17,7.75) 16.5,7.25 R30.2 ; v1(8.79,7.38) 8.79,9.4 8.35,9.85 U5.14
  BOTTOM w0.25: v1(8.79,7.38) 9.19,6.98 16.23,6.98 v1(17,7.75)
N16769008: length 6.4
  TOP w0.25: U5.9 5.59,16.2 5.16,16.63 5.16,16.84 RT1.1 1.74,20.26 R22.1
N16770080: length 8.4
  TOP w0.25: 11.01,18.5 R21.1 C13.2 13.71,17.84 14.18,17.38 17.27,17.38 17.74,17.85 R23.2
N16770609: length 10.9
  TOP w0.25: v1(8.12,8.25) 7.57,8.25 7.19,7.88 4.66,7.88 4.03,7.24 R35.1 R36.1 ; U5.1 10.89,7.3 10,8.2 v1(10,8.25)
  BOTTOM w0.25: v1(8.12,8.25) v1(10,8.25)
N16770930: length 21.4
  TOP w0.25: v1(15.5,8.88) 12.71,8.88 12.41,8.57 11.4,8.57 ; R32.1 26.35,11.24 26.12,11.46 26.12,13.39 25.76,13.75 17.75,13.75 v1(16.5,12.5)
  BOTTOM w0.25: v1(15.5,8.88) 16.5,9.88 v1(16.5,12.5)
N16771107: length 5.2
  TOP w0.25: R32.2 R29.1 27.36,15.11 28.4,16.15 Q5.1
N16772170: length 12
  TOP w0.25: U5.3 13.15,9.85 13.5,9.5 20.76,9.5 R31.1
N16772238: length 14
  TOP w0.25: 11.4,11.12 12.41,11.12 13.05,11.75 17.75,11.75 18.76,12.76 R31.2 23.15,12.76 23.18,12.79 C21.2
N16772569: length 14.4
  TOP w0.25: C16.2 23.18,14.96 23.15,14.99 R26.2 17.49,14.99 15.5,13 12.52,13 11.91,12.38 U5.5
N16772626: length 12.3
  TOP w0.25: R26.1 14.76,16.51 13.5,15.25 13.5,15.25 11.91,13.65 11.4,13.65
N16777000: length 5.1
  TOP w0.25: 6.1,14.93 7.11,14.93 7.75,15.56 7.75,17.25 7.26,17.74 R25.2
N16790844: length 7.9
  TOP w0.25: D2.2 56.1,8.15 55.76,8.49 R14.1 53,6.74 53,6.21 S5.2

## Copper pours and planes (outline as drawn; the poured copper is in the pictures)
GND on TOP: 21.12,45.88 21.12,26.12 32.88,26.12 32.88,45.88 ; 4 cut-outs
GND on TOP: 34.12,45.88 34.12,26.12 58.88,26.12 58.88,45.88 ; 5 cut-outs
GND on TOP: 0.25,26.25 0.25,34.91 5,36 0.25,37.09 0.25,45.75 19.75,45.75 19.75,37.09 15,36 19.75,34.91 19.75,26.25 ; 3 cut-outs
GND on TOP: 34.38,24.62 34.38,13.38 58.62,13.38 58.62,24.62 ; 2 cut-outs
GND on TOP: 34.38,11.62 34.38,0.38 58.62,0.38 58.62,11.62 ; 2 cut-outs
GND on TOP: 0.38,0.38 0.38,11.18 5,12.5 0.38,13.82 0.38,24.62 32.62,24.62 32.62,13.82 28,12.5 32.62,11.18 32.62,0.38 ; 9 cut-outs
GND on BOTTOM: 34.12,45.88 34.12,26.12 58.88,26.12 58.88,45.88 ; 4 cut-outs
GND on BOTTOM: 0.25,26.25 0.25,34.91 5,36 0.25,37.09 0.25,45.75 19.75,45.75 19.75,37.09 15,36 19.75,34.91 19.75,26.25 ; 1 cut-out
GND on BOTTOM: 21.12,45.88 21.12,26.12 32.88,26.12 32.88,45.88 ; 6 cut-outs
GND on BOTTOM: 58.62,0.38 58.62,11.62 34.38,11.62 34.38,0.38 ; 2 cut-outs
GND on BOTTOM: 0.38,0.38 0.38,11.18 5,12.5 0.38,13.82 0.38,24.62 32.62,24.62 32.62,13.82 28,12.5 32.62,11.18 32.62,0.38 ; 5 cut-outs
GND on BOTTOM: 58.62,13.38 58.62,24.62 34.38,24.62 34.38,13.38 ; 2 cut-outs

## Text on the board
Ref Des/Silkscreen Bottom: M250-4 | M250-3 | M250-1 | M250-5 | M250-2
XSECTION_CHART: *  SURFACE - AIR 0 MM | L1 TOP CONDUCTOR - COPPER 0.0305 MM | *  DIELECTRIC - FR-4 0.2032 MM | L2 BOTTOM CONDUCTOR - COPPER 0.0305 MM | DESIGN CROSS SECTION CHART | ___________________________ | TOTAL THICKNESS 0.2642 MM | 1-2
DIMENSION: FIGURE | FINISHED_SIZE | 0.3302 | 0.6 | 0.7 | 0.7874 | DRILL CHART: TOP to BOTTOM | ALL UNITS ARE IN MILLIMETERS | PLATED | QTY | 245 | 14 | 12 | 6
